# Altium PCB midithru.PcbDoc
Units mm, origin at the board's own origin, x right, y up, seen from the top; angles counter-clockwise.
Board outline 132.5 x 32.5 mm, 2 copper layers (Top Layer, Bottom Layer); 29 components, 25 nets, 116 pads, 15 vias.
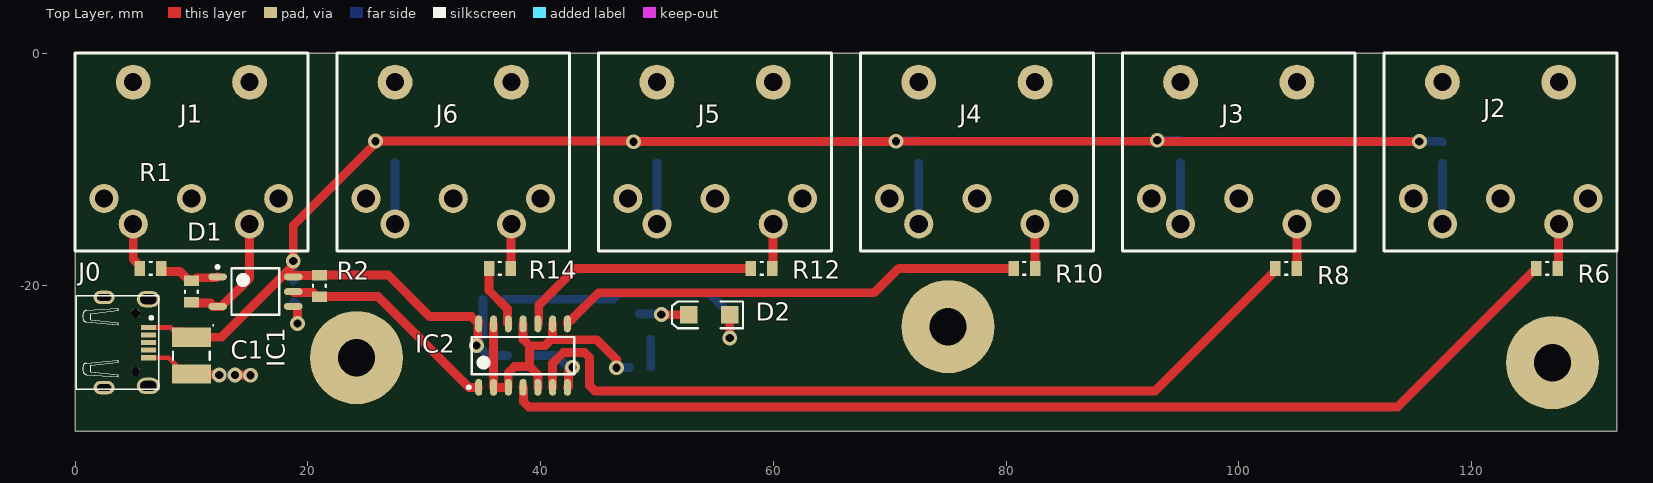
[diagram p0: Top Layer view]
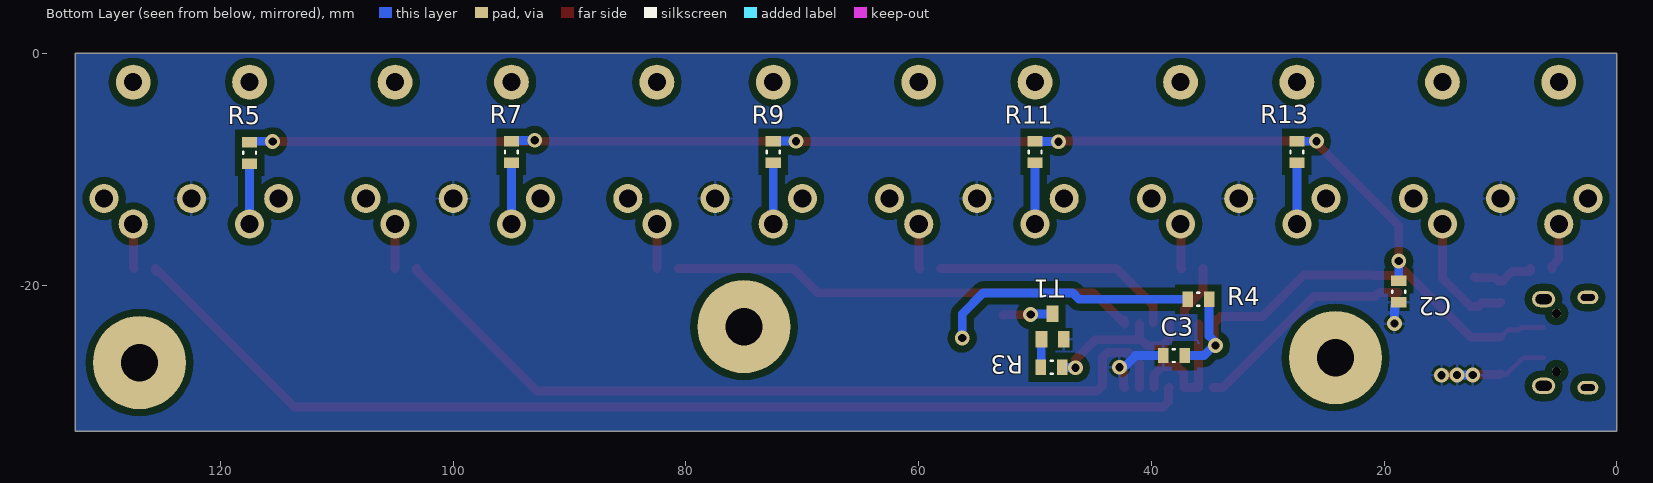
[diagram p1: Bottom Layer view, seen from below]

## Layer stack, top to bottom
Top Solder: solder mask 0.0102, Solder Resist, Dk 3.5
Top Layer: signal copper 0.0356
Dielectric 1: dielectric 0.32, FR-4, Dk 4.8
Bottom Layer: signal copper 0.0356
Bottom Solder: solder mask 0.0102, Solder Resist, Dk 3.5

## Board outline
0,0 132.5,0 132.5,-32.5 0,-32.5

## Design rules (kind name [scope] priority, off if disabled: settings)
Clearance [InPolygon] p1: gap=0.6 ignorepadtopadclearanceinfootprint=FALSE
Clearance Clearance_j0 [HasFootprint('629105150521')] p2: gap=0.203 ignorepadtopadclearanceinfootprint=TRUE
Clearance Clearance_1 [All] p3: gap=0.254 ignorepadtopadclearanceinfootprint=FALSE except(0: Arc-Hole Track-Hole SMDPad-Hole THPad-Hole Via-Hole Fill-Hole Poly-Hole Region-Hole Text-Hole)
HoleSize [All] p1: absolutevalues=TRUE maxlimit=5.08 minlimit=0.025 maxpercent=80.000 minpercent=20.000
MinimumSolderMaskSliver [All] p1: minsoldermaskwidth=0.152
PlaneClearance [All] p1: clearance=1
PolygonConnect [All] p1: connectstyle=Relief reliefconductorwidth=0.254 reliefentries=4 polygonreliefangle="90 Angle" airgapwidth=0.254
RoutingVias [All] p1: holewidth=0.711 width=1.27 viastyle="Through Hole" minholewidth=0.711 minwidth=1.27 maxholewidth=0.711 maxwidth=1.27
SilkToSolderMaskClearance SilkToSolderMaskClearance_usb [HasFootprint('629105150521')] p1: minsilkscreentomaskgap=0 clearancetoexposedcopper=TRUE
SilkToSolderMaskClearance SilkToSolderMaskClearance_1 [IsPad] p2: minsilkscreentomaskgap=0.076 clearancetoexposedcopper=TRUE
SolderMaskExpansion [All] p1: expansion=0.102
Width [All] p1: maxlimit=1.27 minlimit=0.254 preferedwidth=0.762
26 further rules are at their usual default settings.

## Components (designator, comment, footprint, x,y, rotation, side; value= is the part's Value field where it differs from the comment)
C1 "10uF" 1210 10,-26 r270 top
C2 "100n" 0805 18.75,-20.5 r270 bottom value=100pF
C3 "100n" 0805 38.075,-26 r0 bottom value=100pF
D1 "Diode" 0805 10,-20.5 r90 top
D2 "LED1" 3.2X1.6X1.1 54.5,-22.5 r180 top
IC1 "TLP118" SOIC6 15.5,-20.5 r0 top
IC2 "SN74LS14" SOIC14 38.5,-26 r90 top
J0 "WR-Communication Connectors 629105150521" 629105150521 6.3,-24.875 r270 top
J1 "SDS-J" SDS-J 10,0 r180 top
J2 "SDS-J" SDS-J 122.5,0 r180 top
J3 "SDS-J" SDS-J 100,0 r180 top
J4 "SDS-J" SDS-J 77.5,0 r180 top
J5 "SDS-J" SDS-J 55,0 r180 top
J6 "SDS-J" SDS-J 32.5,0 r180 top
R1 "220" 0805 6.5,-18.5 r0 top value=1K
R2 "470" 0805 21,-20 r90 top value=1K
R3 "10k" 0805 48.575,-27 r180 bottom value=1K
R4 "10k" 0805 35.974,-21.155 r180 bottom value=1K
R5 "220" 0805 117.5,-8.575 r270 bottom value=1K
R6 "220" 0805 126.5,-18.5 r0 top value=1K
R7 "220" 0805 95,-8.5 r270 bottom value=1K
R8 "220" 0805 104.075,-18.5 r0 top value=1K
R9 "220" 0805 72.5,-8.5 r270 bottom value=1K
R10 "220" 0805 81.575,-18.5 r0 top value=1K
R11 "220" 0805 50,-8.5 r270 bottom value=1K
R12 "220" 0805 59,-18.5 r0 top value=1K
R13 "220" 0805 27.5,-8.5 r270 bottom value=1K
R14 "220" 0805 36.5,-18.5 r0 top value=1K
T1 "BC847" *SOT23 48.5,-23.5 r180 bottom

## Footprints (in the part's own frame and the unit in brackets; to place one, negate y for a bottom-side part, rotate by r counter-clockwise, add the part's x,y. Pads: shape width x height; smd on the part's side, far side on the other; paste and mask are expansions set on the pad)
3.2X1.6X1.1 [mm] "SMT LED; 2 Flat Leads"
  rect 1.5x1.5 smd: 1(-1.75,0) 2(1.75,0)
  silkscreen extent -2.9,-1.15 3.2,1.15
0805 [mm]
  rect 0.9x1.3 smd: 1(-0.925,0) 2(0.925,0)
  silkscreen extent -0.1,-0.55 0.1,0.55, body extent -1,-0.63 1,0.63, height 0.6
1210 [mm] "Chip Capacitor, 2-Leads, Body 3.50x2.85mm, IPC Medium Density"
  rect 1.65x3.35 smd: 1(-1.575,0) 2(1.575,0)
  silkscreen extent -2.66,-1.58 0.35,1.94, body extent -1.65,-1.35 1.65,1.35, height 0.6
629105150521 [mm] "WR-COM_USB_Micro Type B_Horizontal_SMT Micro Type B Horizontal SMT - 3A current at Pin1 & Pin 5 - with Pegs and THT shielding Pins  - T&R Packaging"
  rect 0.45x1.3 smd: 1(-1.3,0) 2(-0.65,0) 3(0,0) 4(0.65,0) 5(1.3,0)
  oval 1.4x2 hole 0.85 slot 1.4 at 90 deg: Z1(-3.725,0) Z2(3.725,0)
  oval 1.15x1.8 hole 0.55 slot 1.2 at 90 deg: Z4(-3.875,-3.8) Z4(3.875,-3.8)
  round 0.8 hole 0.8 unplated: ""(-2.5,-1.1) ""(2.5,-1.1)
  silkscreen extent -4,-6.2 4,0.9, body extent -4,-6.25 4,0.35, height 2.67
*SOT23 [mm]
  rect 1x1.4 smd: 1(-0.95,-1.1) 2(0.95,-1.1) 3(0,1.1)
SDS-J [mm]
  round 2.5 hole 1.55: 1(7.5,12.5) 2(0,12.5) 3(-7.5,12.5) 4(5,14.7) 5(-5,14.7)
  round 3 hole 1.55: ""(-5,2.5) ""(5,2.5)
  silkscreen extent -10,0 10,17
SOIC6 [mm]
  oval 1.6x0.6 smd: 1(-3.25,1.27) 3(-3.25,-1.27) 4(3.25,-1.27) 5(3.25,0) 6(3.25,1.27)
  silkscreen extent -3.37,-2 2.05,2.24, body extent -3.5,-2 3.5,2, height 2.3
SOIC14 [mm] "SOIC, 14-Leads, Body 8.65x3.90mm, Pitch 1.27mm, IPC Medium Density"
  oval 1.45x0.6 smd: 1(-2.725,3.81) 2(-2.725,2.54) 3(-2.725,1.27) 4(-2.725,0) 5(-2.725,-1.27) 6(-2.725,-2.54) 7(-2.725,-3.81) 8(2.725,-3.81) 9(2.725,-2.54) 10(2.725,-1.27) 11(2.725,0) 12(2.725,1.27) 13(2.725,2.54) 14(2.725,3.81)
  silkscreen extent -2.85,-4.4 1.6,4.78, body extent -3,-4.4 3,4.4, height 1.75

## Part data
C1: library part "Cap Pol3", "Polarized Capacitor (Surface Mount)", LatestRevisionDate=29-May-2009, LatestRevisionNote="IPC-7351 Footprint Added.", PackageDescription="Chip Capacitor", PackageReference=C0805, Published=8-Jun-2000, Publisher="Altium Limited"
C2 C3: library part "Cap Semi", "Capacitor (Semiconductor SIM Model)", LatestRevisionDate=29-May-2009, LatestRevisionNote="IPC-7351 Footprint Added.", PackageDescription="Chip Capacitor", PackageReference=C1206, Published=8-Jun-2000, Publisher="Altium Limited"
D1: "Default Diode", Code_JEDEC=DO-214-AB, LatestRevisionDate=17-Jul-2002, LatestRevisionNote="Re-released for DXP Platform.", PackageDescription="DO-214-AB/SMC; 2 C-Bend Leads; Body 7.9 x 5.9 mm, inc. leads (LxW)", PackageReference=SMC, PackageVersion=Sep-1996, Published=8-Jun-2000, Publisher="Altium Limited"
D2: library part LED2, "Typical RED, GREEN, YELLOW, AMBER GaAs LED", LatestRevisionDate=17-Jul-2002, LatestRevisionNote="Re-released for DXP Platform.", PackageDescription="SM LED; 2 Flat Leads", PackageReference=3.2X1.6X1.1, PackageVersion=Feb-2002, Published=8-Jun-2000, Publisher="Altium Limited"
J0: "WR-COM_USB_Micro Type B_Horizontal_SMT", Manufacturer="Wurth Elektronik eiSos GmbH", partNo=629105150521, ComponentLink1 Description=Manufacturer, ComponentLink1URL=http://www.we-online.de, ComponentLink2 Description=Datasheet, ComponentLink2URL=http://katalog.we-online.de/em/datasheet/629105150521.pdf, Created by="Karrer Zheng", Created Date=10/21/2014, NoPins=5
R1 R2 R3 R4 R5 R6 R7 R8 R9 R10 R11 R12 R13 R14: library part Res3, "Resistor", LatestRevisionDate=29-May-2009, LatestRevisionNote="IPC-7351 Footprint Added.", PackageDescription="Chip Resistor", PackageReference=J1-0603, Published=8-Jun-2000, Publisher="Altium Limited"
T1: Package="SOT-323 Rectron", Availability=Unavailable, MF="Nexperia USA", MP=BC847, Price=None, SnapEDA_Link=https://www.snapeda.com/parts/BC847/Nexperia%20USA%20Inc./view-part/?ref=snap

## Free pads (board coordinates)
  round 8 hole 3.2: ""(24.188,-26.175) ""(75.023,-23.514) ""(126.963,-26.607)

## Via types
v1: diameter 1.27, hole 0.711, Top Layer to Bottom Layer, 15 vias

## Nets (pads, with @x,y where several pads share a name; then routed paths per layer and width w, separated by ;. In a path a pad name is that pad's centre, name@x,y a point inside that pad or via, vN(x,y) a via of type N, cw(c..) or ccw(c..) an arc to the next point about the centre after c; other vN are vias at no path point)
GND: C1.2 C2.2 C3.2 IC1.4 IC2.7 J0.5 J1.2 J2.2 J3.2 J4.2 J5.2 J6.2 T1.2 | length 18.7
  Top Layer w0.406: J0.5 8.05,-26.175 9.45,-27.575 C1.2
  Top Layer w0.762: C1.2 10.048,-27.623 12.352,-27.623 v1(12.4,-27.67) ; v1(13.743,-27.67) 13.752,-27.68 15.06,-27.68 v1(15.07,-27.689) ; v1(19.125,-23.25) 19.125,-22.073 ; IC2.7 42.391,-28.644 42.391,-27.36 v1(42.75,-27)
  Bottom Layer w0.762: v1(12.4,-27.67) 12.415,-27.654 13.708,-27.654 13.724,-27.67 v1(13.743,-27.67) ; C2.2 18.834,-21.425 19.125,-21.716 v1(19.125,-23.25) ; C3.2 41.363,-26 42.363,-27 v1(42.75,-27)
NetD1_1: D1.1 IC1.3 J1.5 | length 10.8
  Top Layer w0.762: D1.1 10.069,-21.494 11.636,-21.494 11.912,-21.77 IC1.3 12.588,-21.77 15,-19.358 J1.5
NetD1_2: D1.2 IC1.1 R1.2 | length 5.5
  Top Layer w0.762: R1.2 7.425,-18.7 7.494,-18.769 8.994,-18.769 9.8,-19.575 D1.2 10.2,-19.575 10.464,-19.311 12.169,-19.311 IC1.1
NetD2_1: D2.1 R4.1 | length 24.4
  Top Layer w0.762: D2.1 56.262,-22.512 v1(56.262,-24.488)
  Bottom Layer w0.762: R4.1@36.929,-21.185 R4.1 46.226,-21.155 46.766,-20.616 54.452,-20.616 56.262,-22.426 v1(56.262,-24.488)
NetD2_2: D2.2 T1.3 | length 4.3
  Top Layer w0.762: v1(50.385,-22.47) 50.4,-22.485 52.735,-22.485 D2.2
  Bottom Layer w0.762: T1.3 48.535,-22.435 50.35,-22.435 v1(50.385,-22.47)
NetIC1_5: IC1.5 IC2.1 R2.1 | length 19.2
  Top Layer w0.762: IC1.5@18.831,-20.581 20.456,-20.581 20.8,-20.925 R2.1 26.044,-20.925 33.844,-28.725 IC2.1
NetIC2_2: IC2.2 IC2.3 IC2.5 IC2.9 IC2.11 IC2.13 R3.2 | length 27.6
  Top Layer w0.762: IC2.13 IC2.2 IC2.3 37.23,-27.478 37.774,-26.934 39.06,-26.934 ; IC2.11 38.5,-24.602 39.054,-25.156 ; IC2.5 39.77,-27.644 39.06,-26.934 ; IC2.9 41.04,-24.49 ; v1(46.537,-27.051) 46.537,-26.348 44.824,-24.635 41.185,-24.635 41.04,-24.49 ; 39.054,-25.156 39.06,-25.162 39.06,-26.934 ; 39.054,-25.156 40.374,-25.156 41.04,-24.49
  Bottom Layer w0.762: v1(46.537,-27.051) 46.563,-27.026 47.624,-27.026 R3.2
NetIC2_4: IC2.4 R6.1 | length 93.5
  Top Layer w0.762: IC2.4 38.539,-28.764 38.539,-29.964 38.986,-30.41 113.665,-30.41 125.306,-18.769 125.506,-18.769 125.575,-18.7 R6.1
NetIC2_6: IC2.6 R8.1 | length 71.8
  Top Layer w0.762: IC2.6 41.04,-26.664 41.974,-25.73 43.773,-25.73 44.219,-26.176 44.219,-28.586 44.666,-29.032 92.818,-29.032 103.15,-18.7 R8.1
NetIC2_8: IC2.8 R10.1 | length 40.5
  Top Layer w0.762: IC2.8 42.31,-23.012 42.391,-22.931 42.654,-22.931 44.985,-20.6 68.68,-20.6 70.779,-18.5 R10.1
NetIC2_10: IC2.10 R12.1 | length 21.1
  Top Layer w0.762: IC2.10@39.851,-23.194 39.851,-21.685 43.036,-18.5 R12.1
NetIC2_12: IC2.12 R14.1 | length 5.5
  Top Layer w0.762: R14.1 35.575,-20.404 37.149,-21.978 37.149,-23.194 IC2.12
NetJ1_4: J1.4 R1.1 | length 4
  Top Layer w0.762: J1.4 5,-17.725 5.575,-18.3 R1.1
NetJ2_4: J2.4 R5.2 | length 5.2
  Bottom Layer w0.762: J2.4 R5.2
NetJ2_5: J2.5 R6.2 | length 3.8
  Top Layer w0.762: R6.2 127.462,-18.462 127.462,-14.737 J2.5
NetJ3_4: J3.4 R7.2 | length 5.3
  Bottom Layer w0.762: J3.4 R7.2
NetJ3_5: J3.5 R8.2 | length 3.8
  Top Layer w0.762: R8.2 J3.5
NetJ4_4: J4.4 R9.2 | length 5.3
  Bottom Layer w0.762: J4.4 R9.2
NetJ4_5: J4.5 R10.2 | length 3.8
  Top Layer w0.762: R10.2 J4.5
NetJ5_4: J5.4 R11.2 | length 5.3
  Bottom Layer w0.762: J5.4 R11.2
NetJ5_5: J5.5 R12.2 | length 3.8
  Top Layer w0.762: R12.2 59.962,-18.462 59.962,-14.737 J5.5
NetJ6_4: J6.4 R13.2 | length 5.3
  Bottom Layer w0.762: J6.4 R13.2
NetJ6_5: J6.5 R14.2 | length 3.8
  Top Layer w0.762: R14.2 37.462,-18.462 37.462,-14.737 J6.5
NetR3_1: R3.1 T1.1 | length 2.4
  Bottom Layer w0.762: T1.1 49.475,-24.625 49.475,-26.975 R3.1
VCC: C1.1 C2.1 C3.1 IC1.6 IC2.14 J0.1 R2.2 R4.2 R5.1 R7.1 R9.1 R11.1 R13.1 | length 157.1
  Top Layer w0.406: J0.1 8.2,-23.575 8.428,-23.803 9.378,-23.803 C1.1
  Top Layer w0.762: C1.1 12.575,-24.425 18.75,-18.25 v1(18.75,-17.875) 18.75,-14.818 25.82,-7.747 v1(25.82,-7.57) 47.945,-7.57 v1(47.992,-7.617) 70.508,-7.617 v1(70.543,-7.582) 92.918,-7.582 v1(93,-7.5) 93.103,-7.603 v1(115.522,-7.603) ; IC1.6@18.869,-19.111 20.964,-19.111 R2.2 26.905,-19.075 30.475,-22.644 34.059,-22.644 34.346,-22.931 34.609,-22.931 34.69,-23.012 IC2.14 34.609,-23.356 34.609,-24.754 34.5,-24.863 v1(34.5,-25.125)
  Bottom Layer w0.762: C2.1 v1(18.75,-17.875) ; v1(25.82,-7.57) 25.83,-7.58 27.495,-7.58 R13.1 ; R4.2 35.049,-24.314 34.5,-24.863 v1(34.5,-25.125) 34.625,-25.125 35.5,-26 C3.1 ; v1(47.992,-7.617) 49.958,-7.617 R11.1 ; v1(70.543,-7.582) 70.558,-7.567 72.492,-7.567 R9.1 ; v1(93,-7.5) 94.925,-7.5 R7.1 ; v1(115.522,-7.603) 115.544,-7.581 117.431,-7.581 R5.1
pads on no net: J0. J0.2 J0.3 J0.4 J0.Z1 J0.Z2 J0.Z4 J1. J1.1 J1.3 J2. J2.1 J2.3 J3. J3.1 J3.3 J4. J4.1 J4.3 J5. J5.1 J5.3 J6. J6.1 J6.3

## Polygon pours and split planes (outlines as drawn)
no net on Top Overlay (solid): 0,0 132.5,0
GND on Bottom Layer (solid, remove dead copper, pour order 0): 0,0 132.5,0 132.5,-32.5 0,-32.5

## Silkscreen, mask and mechanical layers (free items; w line width, h text height)
Mechanical 1:
  the board outline again, w1.2